# Altium PCB PCB.PcbDoc
Units mm, origin at the board's own origin, x right, y up, seen from the top; angles counter-clockwise.
Board outline 100.25 x 95.41 mm, 2 copper layers (Top Layer, Bottom Layer); 83 components, 112 nets, 272 pads, 109 vias.
Unrouted connection lines stored in the file: 85.
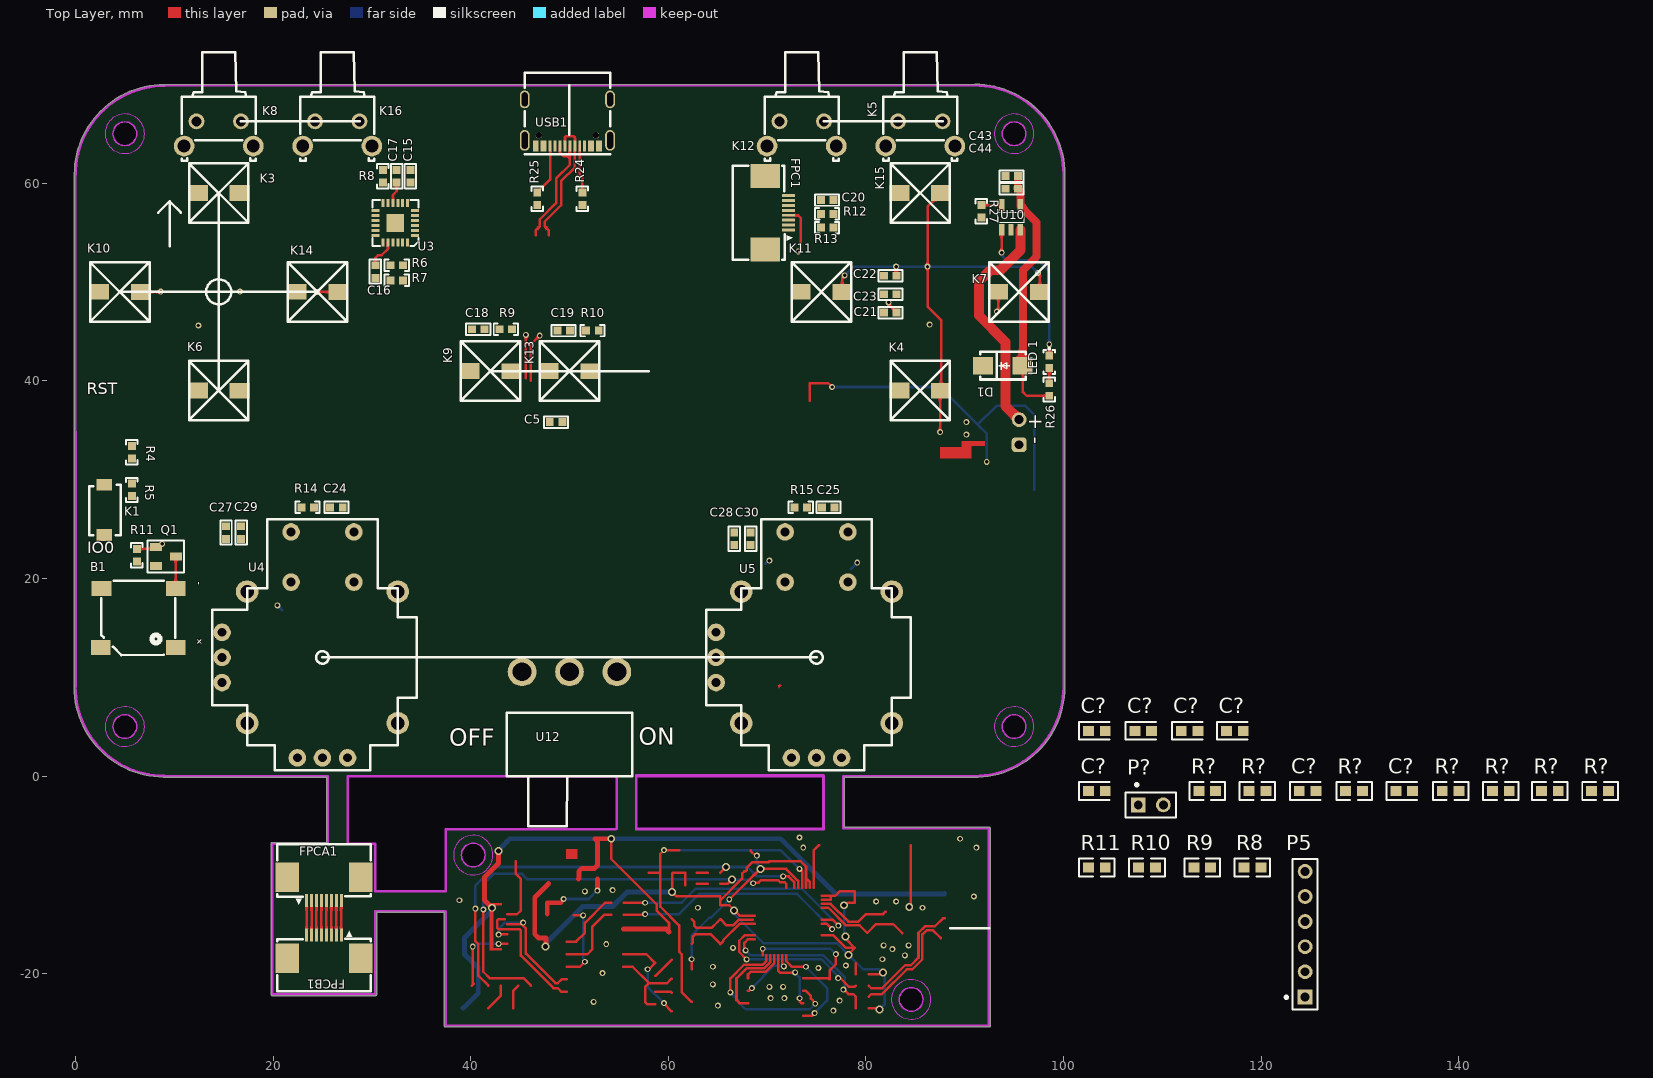
[diagram p0: Top Layer view]
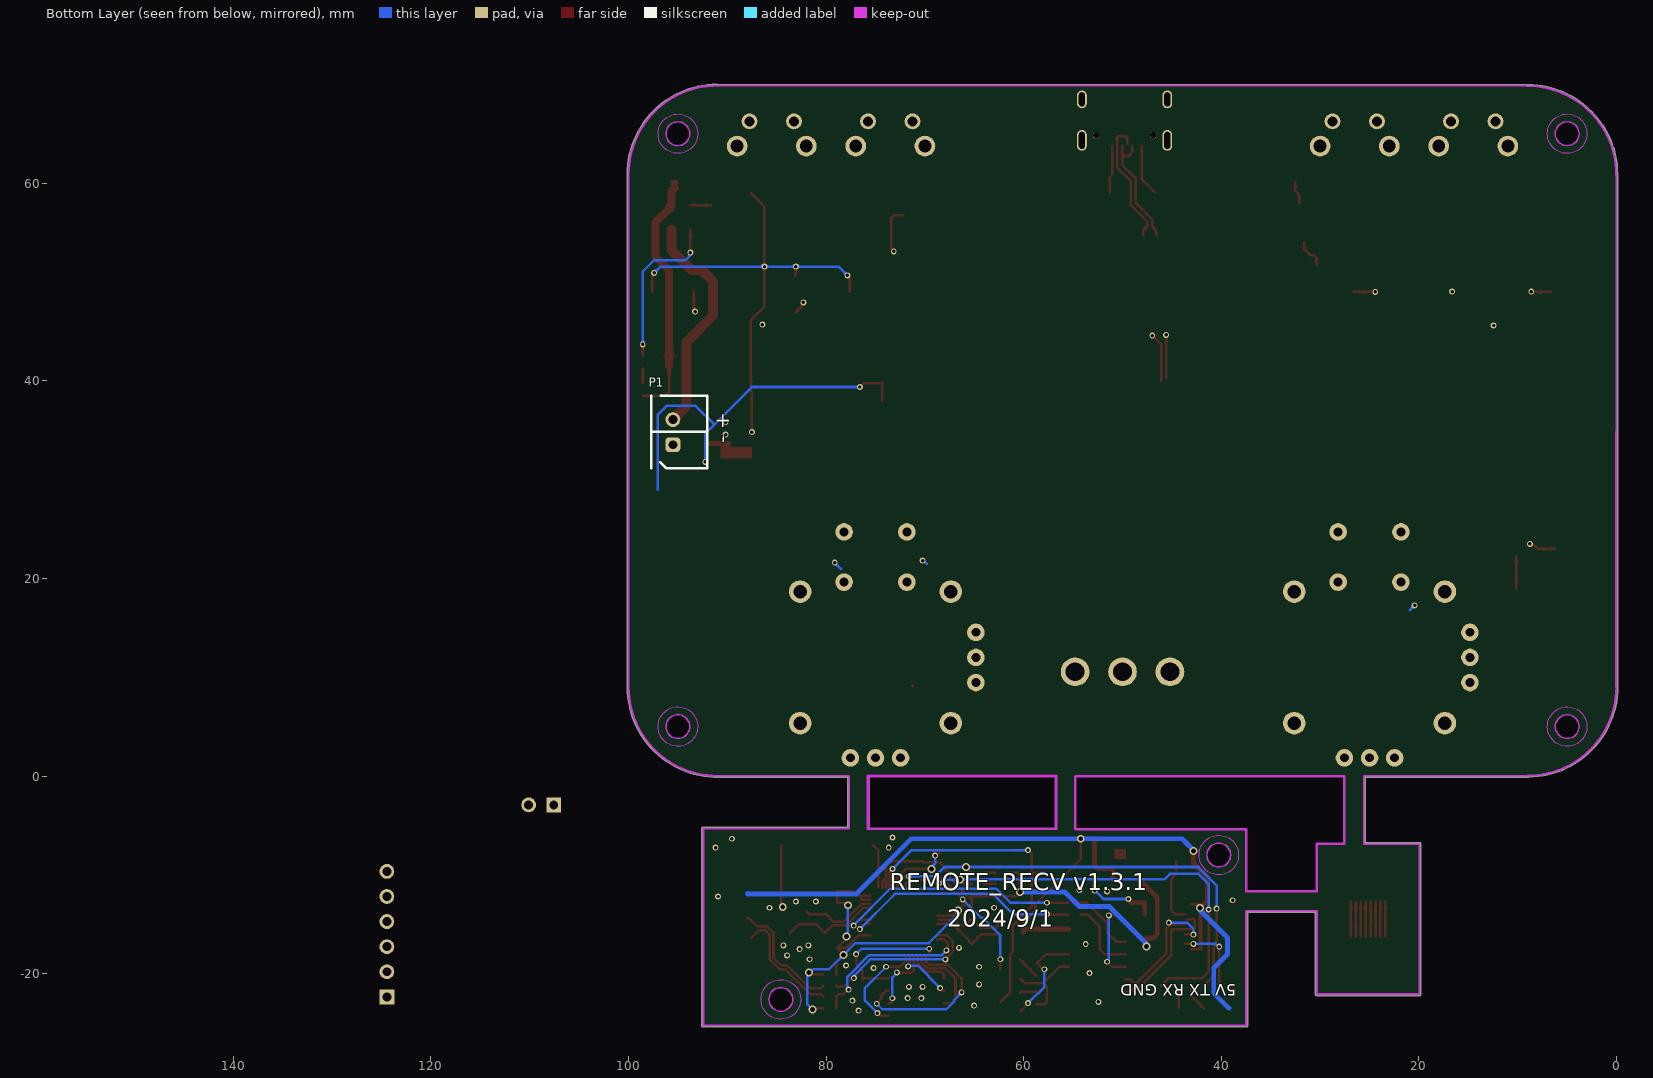
[diagram p1: Bottom Layer view, seen from below]

## Layer stack, top to bottom
Top Solder: solder mask 0.0102, Solder Resist, Dk 3.5
Top Layer: signal copper 0.0356
Dielectric 1: dielectric 0.32, FR-4, Dk 4.8
Bottom Layer: signal copper 0.0356
Bottom Solder: solder mask 0.0102, Solder Resist, Dk 3.5

## Board outline
-0.127,9.017 ccw(c9,9.017) 8.936,-0.11 ccw(c9,0) 9,-0.127 25.432,-0.127 25.432,-6.731 19.939,-6.731 ccw(c19.939,-6.858) 19.812,-6.858 19.812,-22.098 ccw(c19.939,-22.098) 19.939,-22.225 30.353,-22.225 ccw(c30.353,-22.098) 30.48,-22.098 30.48,-13.811 37.338,-13.811 37.338,-25.273 ccw(c37.465,-25.273) 37.465,-25.4 92.456,-25.4 ccw(c92.456,-25.273) 92.583,-25.273 92.583,-5.302 ccw(c92.456,-5.302) 92.456,-5.175 77.819,-5.175 77.819,-0.127 91.313,-0.127 ccw(c91.313,0) 91.354,-0.121 ccw(c91,9) 100.127,9 100.127,60.895 ccw(c91.011,60.895) 91.011,70.011 ccw(c91.011,69.884) 91.011,70.011 9.017,69.977 ccw(c9.017,69.85) 9.017,69.977 ccw(c9.017,60.85) 9.008,69.977 9.017,69.977 9.008,69.977 9,69.977 ccw(c9,69.85) 8.998,69.977 cw(c9.017,60.85) 9.008,69.977 8.998,69.977 ccw(c9.017,60.85) -0.11,60.897 ccw(c0,60.833) -0.127,60.833 -0.107,9.086 ccw(c0,9.017)
cut-out: 83.382,-22.606 ccw(c84.582,-22.606) 84.582,-23.806 ccw(c84.582,-22.606) 85.782,-22.606 ccw(c84.582,-22.606) 84.582,-21.406 ccw(c84.582,-22.606)
cut-out: 39.059,-8.001 ccw(c40.259,-8.001) 40.259,-9.201 ccw(c40.259,-8.001) 41.459,-8.001 ccw(c40.259,-8.001) 40.259,-6.801 ccw(c40.259,-8.001)
cut-out: 56.642,-5.334 ccw(c56.769,-5.334) 56.769,-5.461 75.56,-5.461 ccw(c75.56,-5.334) 75.626,-5.443 ccw(c75.692,-5.334) 75.819,-5.334 75.819,0 ccw(c75.692,0) 75.692,0.127 56.769,0.127 ccw(c56.769,0) 56.642,0
cut-out: 93.8,5 ccw(c95,5) 95,3.8 ccw(c95,5) 96.2,5 ccw(c95,5) 95,6.2 ccw(c95,5)
cut-out: 3.8,5 ccw(c5,5) 5,3.8 ccw(c5,5) 6.2,5 ccw(c5,5) 5,6.2 ccw(c5,5)
cut-out: 5,63.8 cw(c5,65) 3.8,65 cw(c5,65) 5,66.2 cw(c5,65) 6.2,65 cw(c5,65)
cut-out: 93.8,65 ccw(c95,65) 95,63.8 ccw(c95,65) 96.2,65 ccw(c95,65) 95,66.2 ccw(c95,65)
cut-out: 27.559,-6.858 27.559,0 54.674,0 54.769,-0.095 54.769,-5.334 54.703,-5.4 37.465,-5.4 37.465,-11.684 30.353,-11.684 30.353,-6.858

## Design rules (kind name [scope] priority, off if disabled: settings)
Clearance [All] p1: gap=0.1 ignorepadtopadclearanceinfootprint=FALSE except(0: Arc-Hole Track-Hole SMDPad-Hole THPad-Hole Via-Hole Fill-Hole Poly-Hole Region-Hole Text-Hole; 0.102: Arc-Arc Arc-Track Arc-SMDPad Arc-THPad Track-Track Track-SMDPad Track-THPad SMDPad-SMDPad SMDPad-THPad THPad-THPad; 0.127: Arc-Via Track-Via SMDPad-Via SMDPad-Text THPad-Via Via-Via; 0.254: Arc-Text Track-Text THPad-Text Via-Text Fill-Text Poly-Text Region-Text Text-Text)
DiffPairsRouting [All] p1: maxlimit=0.254 minlimit=0.15 mostfreqgap=0.254 toplayer_minwidth=0.2 toplayer_maxwidth=0.381 toplayer_prefwidth=0.25 bottomlayer_minwidth=0.2 bottomlayer_maxwidth=0.381 bottomlayer_prefwidth=0.25 maxuncoupledlength=12.7
HoleSize [All] p1: absolutevalues=TRUE maxlimit=30 minlimit=0.025 maxpercent=80.000 minpercent=20.000
HoleToHoleClearance [All] p1: gap=0.152 allowstackedmicrovias=TRUE
MinimumSolderMaskSliver [All] p1: minsoldermaskwidth=0
PlaneClearance [All] p1: clearance=0.254
PlaneConnect [All] p1: planeconnectstyle=Direct reliefexpansion=0.508 reliefentries=4 reliefconductorwidth=0.254 reliefairgap=0.254
PolygonConnect [All] p1: connectstyle=Direct reliefconductorwidth=0.254 reliefentries=4 polygonreliefangle="90 Angle" airgapwidth=0.254
RoutingVias [All] p1: holewidth=0.711 width=1.27 viastyle="Through Hole" minholewidth=0.3 minwidth=0.5 maxholewidth=30 maxwidth=30
SilkToSilkClearance [All] p1: silktosilkclearance=0
SilkToSolderMaskClearance [IsPad] p1: minsilkscreentomaskgap=0 clearancetoexposedcopper=TRUE
SolderMaskExpansion [All] p1: expansion=0.102 istentingtop=FALSE
Width [All] p1: maxlimit=3 minlimit=0.1 preferedwidth=0.254
22 further rules are at their usual default settings.

## Classes and differential pairs
component class connect_board: FPCA1 FPCB1
component class Sheet0-mcu: C5 K1 "LED 1" P5 R4 R5 R8 R9 R10 R11
component class Sheet1-control: B1 C15 C16 C17 C18 C19 C20 C21 C22 C23 C24 C25 C27 C28 C29 C30 C? FPC1 K3 K4 K5 K6 K7 K8 K9 K10 K11 K12 K13 K14 K15 K16 P? Q1 R6 R7 R8 R9 R10 R11 R12 R13 R14 R15 R? U3 U4 U5
component class Sheet2-USB: C43 C44 C? D1 "LED 1" P1 R24 R25 R26 R27 U10 U12 USB1
differential pair USB: +USB_P -USB_N

## Components (designator, comment, footprint, x,y, rotation, side; value= is the part's Value field where it differs from the comment)
B1 "BUZZER1" BUZ-SMD_GSC7525RA 6.35,16.002 r180 top
C5 "12.5pF" CC1608-0603#1 48.641,35.814 r0 top
C15 "100NF 50V" CC1608-0603#1 33.909,60.706 r270 top
C16 "2.2UF" CC1608-0603#1 30.353,51.054 r270 top
C17 "100NF" CC1608-0603#1 32.512,60.706 r270 top
C18 "100PF" CC1608-0603#1 40.767,45.212 r180 top
C19 "100PF" CC1608-0603#1 49.403,45.085 r180 top
C20 "100NF" CC1608-0603#1 76.073,58.293 r0 top
C21 "100pF" CC1608-0603#1 82.478,46.89 r0 top locked
C22 "100pF" CC1608-0603#1 82.478,50.628 r0 top
C23 "100pF" CC1608-0603#1 82.478,48.759 r0 top
C24 "100nF" CC1608-0603#1 26.416,27.178 r180 top
C25 "100nF" CC1608-0603#1 76.2,27.178 r180 top
C27 "100nF" CC1608-0603#1 15.24,24.638 r90 top
C28 "100nF" CC1608-0603#1 66.675,24.003 r90 top
C29 "100pF" CC1608-0603#1 16.764,24.638 r90 top
C30 "100pF" CC1608-0603#1 68.326,24.003 r90 top
C43 "1uF" CC1608-0603#1 94.742,60.706 r0 top
C44 "100NF" CC1608-0603#1 94.742,59.436 r0 top
C? "100PF" CC1608-0603#2 103.368,-1.524 r0 top
C? "100NF" CC1608-0603#2 134.483,-1.524 r0 top
C? "100NF" CC1608-0603#2 124.704,-1.524 r0 top
C? "100NF" CC1608-0603#2 112.766,4.572 r0 top
C? "10UF" CC1608-0603#2 108.067,4.572 r0 top
C? "10UF" CC1608-0603#2 117.338,4.572 r0 top
C? "100NF" CC1608-0603#2 103.368,4.572 r0 top
D1 "SS34" "DO-214 AA" 93.853,41.529 r0 top
FPC1 "FFC 05 8P" FFC-SMD_8P-P0.50 71,57 r270 top locked
FPCA1 "FFC 05 8P" FFC-SMD_8P-P0.50 25.156,-11.43 r180 top
FPCB1 "FFC 05 8P" FFC-SMD_8P-P0.50 25.156,-17.272 r0 top
K1 "KEY 3*4" "KEY 3*4" 2.921,24.384 r90 top
K3 "KEY 6*6*5" "KEY 6*6*5" 14.5,59 r0 top locked
K4 "KEY 6*6*5" "KEY 6*6*5" 85.5,39 r0 top locked
K5 "SW-TH_4P_H" SW-TH_KH-6X6X7H-ZJ 85.5,65 r0 top locked
K6 "KEY 6*6*5" "KEY 6*6*5" 14.5,39 r0 top locked
K7 "KEY 6*6*5" "KEY 6*6*5" 95.5,49 r0 top locked
K8 "SW-TH_4P_H" SW-TH_KH-6X6X7H-ZJ 14.5,65 r0 top locked
K9 "KEY 6*6*5" "KEY 6*6*5" 42,40.983 r0 top locked
K10 "KEY 6*6*5" "KEY 6*6*5" 4.5,49 r0 top locked
K11 "KEY 6*6*5" "KEY 6*6*5" 75.5,49 r0 top locked
K12 "SW-TH_4P_H" SW-TH_KH-6X6X7H-ZJ 73.5,65 r0 top locked
K13 "KEY 6*6*5" "KEY 6*6*5" 50,40.983 r0 top locked
K14 "KEY 6*6*5" "KEY 6*6*5" 24.5,49 r0 top locked
K15 "KEY 6*6*5" "KEY 6*6*5" 85.5,59 r0 top locked
K16 "SW-TH_4P_H" SW-TH_KH-6X6X7H-ZJ 26.5,65 r0 top locked
"LED 1" "LED 0603" "LED 0603" 98.552,41.91 r90 top
P1 "Header 2" HX2.54-2 95.504,33.528 r90 bottom locked
P5 "Header 6" HDR1X6 124.45,-22.352 r90 top
P? "Header 2" HDR1X2 107.559,-2.921 r0 top
Q1 "SI2302" SOT-23 8.14,23.175 r270 top
R4 "22R" CR1608-0603#1 5.715,32.766 r270 top
R5 "22R" CR1608-0603#1 5.715,28.956 r90 top
R6 "2K" CR1608-0603#1 32.512,51.689 r0 top
R7 "2K" CR1608-0603#1 32.512,50.165 r0 top
R8 "470R" CR1608-0603#2 119.116,-9.271 r0 top
R8 "4.7K" CR1608-0603#1 31.115,60.706 r270 top
R9 "470R" CR1608-0603#2 114.036,-9.271 r0 top
R9 "10K" CR1608-0603#1 43.561,45.212 r180 top
R10 "1K" CR1608-0603#2 108.448,-9.271 r0 top
R10 "10K" CR1608-0603#1 52.324,45.085 r180 top
R11 "1K" CR1608-0603#2 103.368,-9.271 r0 top
R11 "33KR" CR1608-0603#1 6.223,22.352 r270 top
R12 "10K" CR1608-0603#1 76.073,56.896 r0 top
R13 "10K" CR1608-0603#1 76.073,55.499 r0 top
R14 "10K" CR1608-0603#1 23.495,27.178 r180 top
R15 "10K" CR1608-0603#1 73.406,27.178 r180 top
R24 "5.1K" CR1608-0603#1 51.308,58.42 r90 top
R25 "5.1K" CR1608-0603#1 46.736,58.42 r90 top
R26 "1K" CR1608-0603#1 98.552,39.116 r90 top
R27 "2K" CR1608-0603#1 91.694,57.15 r270 top
R? "10K" CR1608-0603#2 129.403,-1.524 r0 top
R? "100R" CR1608-0603#2 114.544,-1.524 r0 top
R? "10K" CR1608-0603#2 119.624,-1.524 r0 top
R? "10KR" CR1608-0603#2 139.182,-1.524 r0 top
R? "100KR" CR1608-0603#2 154.295,-1.524 r0 top
R? "10K" CR1608-0603#2 149.215,-1.524 r0 top
R? "10K" CR1608-0603#2 144.262,-1.524 r0 top
U3 "MPU6050" "QFN24 - duplicate" 32.373,55.975 r180 top
U4 "rocker" PCBCOMPONENT_1 25,12 r0 top locked
U5 "rocker" PCBCOMPONENT_1 75,12 r0 top locked
U10 "TP4054" SOT23-5 95.636,55.285 r180 top
U12 "HX SS12D10G4" SW-TH_3P-SS12D06 50,10.541 r0 top locked
USB1 "Tpye-c 16P" "TYPE-C 16P" 46.898,64.829 r180 top locked

## Footprints (in the part's own frame and the unit in brackets; to place one, negate y for a bottom-side part, rotate by r counter-clockwise, add the part's x,y. Pads: shape width x height; smd on the part's side, far side on the other; paste and mask are expansions set on the pad)
BUZ-SMD_GSC7525RA [mm]
  rect 2x1.5 smd paste+0 mask+0.051: 1(-3.795,2.98) 2(-3.795,-2.98) 3(3.705,-2.98) 3(3.795,2.98)
  silkscreen extent -3.75,-3.75 3.76,3.76, body extent -3.81,-3.81 3.69,3.69, height 2.5
CC1608-0603#1 [mm]
  rect 0.8x0.8 smd: 1(-0.635,0) 2(0.635,0)
  silkscreen extent -1.23,-0.58 1.23,0.58, body extent -0.8,-0.4 0.8,0.4, height 0.3
CC1608-0603#2 [mm]
  rect 1.1x1 smd: 1(-0.85,0) 2(0.85,0)
  silkscreen extent -1.8,-0.9 1.3,0.9, body extent -0.8,-0.4 0.8,0.4, height 0.3
CR1608-0603#1 [mm]
  rect 0.8x0.8 smd: 1(-0.635,0) 2(0.635,0)
  silkscreen extent -1.23,-0.58 1.23,0.58, body extent -0.8,-0.4 0.8,0.4, height 0.45
CR1608-0603#2 [mm]
  rect 1.1x1 smd: 1(-0.85,0) 2(0.85,0)
  silkscreen extent -1.8,-0.9 1.8,0.9, body extent -0.8,-0.4 0.8,0.4, height 0.45
"DO-214 AA" [mm] "SMB"
  rect 2x1.8 smd: 1(-2,0) 2(2,0)
  silkscreen extent -2.3,-1.4 2.3,1.4, body extent -2.83,-1.8 2.57,1.8, height 2.4
FFC-SMD_8P-P0.50 [mm]
  rect 0.3x1.3 smd paste+0 mask+0.051: 1(1.75,1.175) 2(1.25,1.175) 3(0.75,1.175) 4(0.25,1.175) 5(-0.25,1.175) 6(-0.75,1.175) 7(-1.25,1.175) 8(-1.75,1.175)
  rect 2.4x3 smd paste+0 mask+0.051: 9(3.725,-1.175) 10(-3.725,-1.175)
  silkscreen extent -4.75,-4.5 4.75,1.6, body extent -3.18,-2.71 3.18,0.89, height 0.85
HDR1X2 [mm] "Connector; Header; 2 Position"
  rect 1.5x1.5 hole 0.9: 1(0,0)
  round 1.5 hole 0.9: 2(2.54,0)
  silkscreen extent -1.27,-1.27 3.81,2.17, body extent -1.27,-1.27 3.81,1.27, height 8.54
HDR1X6 [mm] "Connector; Header; 6 Position"
  rect 1.5x1.5 hole 0.9: 1(0,0)
  round 1.5 hole 0.9: 2(2.54,0) 3(5.08,0) 4(7.62,0) 5(10.16,0) 6(12.7,0)
  silkscreen extent -1.27,-1.27 13.97,2.04, body extent -1.27,-1.27 13.97,1.27, height 8.54
HX2.54-2 [mm] "两针白色插座（已加焊）"
  rrect50% 1.5x1.5 hole 0.9: 1(0,0)
  round 1.5 hole 0.9: 2(2.54,0)
  silkscreen extent -2.36,-3.5 4.94,2.2, body extent -2.48,-3.55 5.02,2.45, height 7
"KEY 3*4" [mm]
  rect 1.2x1.6 smd: 1(0,0) 2(5.1,0)
  silkscreen extent 0,-1.65 5.08,1.52, body extent 0.25,-1.71 4.7,1.46, height 2.01
"KEY 6*6*5" [mm] "无声微动开关"
  rect 2x1.6 smd: 1(-2.1,0) 2(2.1,-0.013)
  silkscreen extent -3,-3.01 3,3.01, body extent -3.32,-3.05 3.33,3.05, height 5
"LED 0603" [mm]
  rect 0.8x0.8 smd: 1(-0.635,0) 2(0.635,0)
  silkscreen extent -1.21,-0.57 1.4,0.57, body extent -0.8,-0.4 0.8,0.4, height 0.6
PCBCOMPONENT_1 [mil]
  round 70 hole 35.4 paste+0 mask+4: 1(-125,500) 2(125,500) 3(-125,300) 4(125,300)
  round 70 hole 35 paste+0 mask+4: 5(-400,100) 6(-400,0) 7(-400,-100) 8(-100,-400) 9(0,-400) 10(100,-400)
  round 90 hole 55 paste+0 mask+4: MOUNT1(-300,262) MOUNT2(-300,-262) MOUNT3(300,-262) MOUNT4(300,262)
  silkscreen extent -440,-450 375,550, body extent -447,-446 290,535, height 772
"QFN24 - duplicate" [mm]
  rect 0.8x0.3 smd: 1(-2,1.25) 2(-2,0.75) 3(-2,0.25) 4(-2,-0.25) 5(-2,-0.75) 6(-2,-1.25) 13(2,-1.25) 14(2,-0.75) 15(2,-0.25) 16(2,0.25) 17(2,0.75) 18(2,1.25)
  rect 1.8x1.8 smd: 1(0.005,0)
  rect 0.3x0.8 smd: 7(-1.25,-2) 8(-0.75,-2) 9(-0.25,-2) 10(0.25,-2) 11(0.75,-2) 12(1.25,-2) 19(1.25,2) 20(0.75,2) 21(0.25,2) 22(-0.25,2) 23(-0.75,2) 24(-1.25,2)
  silkscreen extent -2.32,-2.32 2.32,2.32, body extent -2,-2 2.01,2, height 0.9
SOT23-5 [mm] "适用于MIC5205"
  rect 0.55x1.2 smd: 1(1.905,0) 2(0.955,0) 3(0.005,0) 4(0.005,-2.5) 5(1.905,-2.5)
  silkscreen extent -0.38,-1.78 2.29,-0.76, body extent -0.6,-2.82 2.5,0.38, height 1.45
SOT-23 [mm]
  rect 0.8x1.2 smd: 1(0,0) 2(1.905,0) 3(0.95,2.02)
  silkscreen extent -0.66,-0.84 2.57,2.84, body extent -0.61,-0.23 2.39,2.27, height 1.05
SW-TH_3P-SS12D06 [mm]
  round 2.9 hole 1.9 paste+0 mask+0.051: 1(-4.8,0) 2(0,0) 3(4.8,0)
  silkscreen extent -6.35,-15.62 6.35,-4.15, body extent -6.35,-15.68 6.35,-4.19, height 6.7
SW-TH_KH-6X6X7H-ZJ [mm]
  round 1.6 hole 1 paste+0 mask+0.05: 1(2.25,1.25) 2(-2.25,1.25)
  round 2.1 hole 1.3 paste+0 mask+0.05: 3(3.5,-1.25) 4(-3.5,-1.25)
  silkscreen extent -3.75,-2.75 3.75,8.25, body extent -3.75,-2.48 3.75,5.67, height 7.5
"TYPE-C 16P" [mm]
  oval 1x2.099 hole 0.6 slot 1.7 at 90 deg: 1(-7.21,0.5) 2(1.43,0.5)
  oval 1x1.799 hole 0.6 slot 1.4 at 90 deg: 3(-7.21,-3.65) 4(1.43,-3.65)
  rect 0.6x1.15 smd: A1B12(-6.09,1.075) A4B9(-5.29,1.075) B1A12(0.31,1.075) B4A9(-0.49,1.075)
  rect 0.3x1.15 smd: A5(-4.14,1.075) A6(-3.14,1.075) A7(-2.64,1.075) A8(-1.64,1.075) B5(-1.14,1.075) B6(-2.14,1.075) B7(-3.64,1.075) B8(-4.64,1.075)
  round 0.65 hole 0.65 unplated: ""(-5.78,0) ""(0,0)
  silkscreen extent -7.21,-6.37 1.43,1.89, body extent -7.31,-6 1.63,0.9, height 3.18

## Part data
B1: "2700Hz", Manufacturer=INGHAi(赢海), Manufacturer Part=GSC7525RA-16R2700, Contributor=LCSC, nameAlias=Value, spicePre=B, spiceSymbolName=GSC7525RA-16R2700, Supplier=LCSC, Supplier Part=C255313
C5 C15 C16 C17 C18 C19 C20 C21 C22 C23 C24 C25 C27 C28 C29 C30 C43 C44 C? C? C? C? C? C? C?: library part "Cap Chip 0603", "0603封装的电容", Published=8-Jun-2000, Publisher="Altium Limited", Revision="July-2002: Re-released for DXP Platform."
D1: "肖特基二极管"
FPC1 FPCA1 FPCB1: JLCPCB Part Class="Extended Part", Manufacturer=TXGA(特思嘉), Manufacturer Part=FFC05001-08SBB124W5M-H, Contributor=LCSC, spicePre=F, spiceSymbolName=FFC05001-08SBB124W5M-H, Supplier=LCSC, Supplier Part=C456420
K1: "轻触开关按键"
K3 K4 K6 K7 K9 K10 K11 K13 K14 K15: "无声轻触开关"
K5 K8 K12 K16: "卧式轻触开关"
P1 P?: "Header, 2-Pin", LatestRevisionDate=17-Jul-2002, LatestRevisionNote="Re-released for DXP Platform.", Publisher="Altium Limited"
P5: "Header, 6-Pin", LatestRevisionDate=17-Jul-2002, LatestRevisionNote="Re-released for DXP Platform.", Publisher="Altium Limited"
Q1: "N沟道  / 漏源电压(Vdss) 20V  / 连续漏极电流(Id) 2.8A  / 功率(Pd) 900mW  / 导通电阻(RDS(on)@Vgs,Id) 55mΩ@4.5V,2.8A  / 阈值电压(Vgs(th)@Id) 1.2V@250uA  / 输入电容(Ciss@Vds) 260pF@10V", JLCPCB Part Class="Extended Part", Manufacturer=TWGMC(台湾迪嘉), Manufacturer Part=SI2306, Contributor=LCSC, spicePre=Q, spiceSymbolName=SI2306_C727154, Supplier=LCSC, Supplier Part=C727154
R4 R5 R6 R7 R8 R9 R10 R10 R11 R12 R13 R14 R15 R24 R25 R26 R27 R? R? R? R? R?: library part "Resistor Chip 0603", "0603封装电阻", Published=8-Jun-2000, Publisher="Altium Limited", Revision="July-2002: Re-released for DXP Platform."
R8 R9 R11 R? R?: library part "Chip resistor", "贴片电阻"
U3: "陀螺仪"
U4 U5: Manufacturer Part=摇杆, Contributor=Alex_Ai, spicePre=U, spiceSymbolName="摇杆_直插_圆半径13_10电气脚_4固定脚 COPY"
U10: "迷你充电IC SOT-23-5"
U12: library part SW-TH_3P-SS12D06, BOM_JLCPCB Part Class="Extended Part", BOM_Manufacturer=hanxia(韩下), BOM_Manufacturer Part="HX SS12D10G4", BOM_Supplier=LCSC, BOM_Supplier Part=C5149841, Contributor=lcsc, link=https://atta.szlcsc.com/upload/public/pdf/source/20220907/2020D7183ED16DD6E2B9F5A13FB144CF.pdf, spicePre=U, spiceSymbolName="HX SS12D10G4"
USB1: "16P 封装的TYPE -c接口 4固定插脚 双向"

## Via types
v1: diameter 0.6, hole 0.35, Top Layer to Bottom Layer, tented both sides, 94 vias
v2: diameter 0.8, hole 0.5, Top Layer to Bottom Layer, tented both sides, 15 vias

## Nets (pads, with @x,y where several pads share a name; then routed paths per layer and width w, separated by ;. In a path a pad name is that pad's centre, name@x,y a point inside that pad or via, vN(x,y) a via of type N, cw(c..) or ccw(c..) an arc to the next point about the centre after c; other vN are vias at no path point)
3.3V: B1.1 C15.2 C20.1 FPC1.7 R6.1 R7.1 R8.1@31.115,61.341 R9.1@44.196,45.212 R10.1@52.959,45.085 R12.2 R13.2 R14.2 R15.2 R?.2@155.145,-1.524 U3.8 U3.13 U4.5 U4.8 U5.5 U5.8
5V: C?.2@104.218,4.572 C?.2@108.917,4.572 D1.1
ADC_BAT: C?.2@135.333,-1.524 R?.1@148.365,-1.524 R?.2@130.253,-1.524
ADC_LX: C27.2 U4.6
ADC_LY: C29.2 U4.9
ADC_RX: C28.2 U5.6
ADC_RY: C30.2 U5.9
BAT: P?.1 R?.1@113.694,-1.524 R?.2@150.065,-1.524 U12.3
BEEP: Q1.1 R11.1@6.223,22.987 | length 2.8
  Top Layer w0.254: R11.1@6.223,22.987 7.952,22.987 8.394,23.429 8.603,23.429 8.669,23.495 v1(8.763,23.495)
BOOT0: 
EN: P?.2
GND: "LED 1.2" C5.1 C15.1 C16.2 C17.1 C18.2 C19.2 C20.2 C21.1 C22.1 C23.1 C24.1 C25.1 C27.1 C28.1 C29.1 C30.1 C43.1 C44.1 C?.1@102.518,4.572 C?.1@107.217,4.572 C?.1@111.916,4.572 C?.1@116.488,4.572 C?.1@123.854,-1.524 C?.1@133.633,-1.524 FPC1.2 K1.2 K9.2 K13.2 P1.1 P5.4 Q1.2 R11.2@6.223,21.717 R24.1 R25.1 R27.2 R?.1@118.774,-1.524 R?.1@128.553,-1.524 R?.1@138.332,-1.524 U3.1 U3.6 U3.7 U3.9 U3.11 U3.18 U4.1 U4.7 U4.10 U5.1 U5.7 U5.10 U10.2 USB1.1 USB1.2 USB1.3 USB1.4 USB1.A1B12 USB1.B1A12
IIC2_SCL: R6.2 U3.23
IIC2_SDA: R7.2 U3.24
KET_y: K14.1 K15.1 K16.1
KEY_1: C24.2 R14.1 U4.3
kEY_2: C25.2 R15.1 U5.3
KEY_a: K3.1 K4.1 K5.1 | length 1.3
  Bottom Layer w0.254: v1(20.447,17.272) 20.955,16.764 ; 69.802,21.463 70.137,21.798 v1(70.231,21.798)
KEY_b: K6.1 K7.1 K8.1 | length 3
  Top Layer w0.254: v1(93.251,46.99) 93.4,47.139 K7.1
  Bottom Layer w0.254: 78.486,20.955 v1(79.121,21.59)
  other v1: 12.446,45.593 86.455,45.688
KEY_CHA: R?.1@153.445,-1.524
KEY_CHA_IN: C?.2@104.218,-1.524 R?.2@140.032,-1.524
KEY_DOWN_1: C21.2 K3.2 K6.2 K10.2 K14.2 | length 5.6
  Top Layer w0.254: K10.2 v1@8.601,48.987 ; v1(24.419,48.987) K14.2 ; v1(82.296,47.925) 82.362,47.859 82.362,47.641 C21.2
  other v1: 8.636,49.022 16.637,49.022
KEY_DOWN_2: C22.2 K4.2 K7.2 K11.2 K15.2 | length 50.3
  Top Layer w0.254: K11.2 77.6,50.422 v1(77.851,50.673) ; v1(83.058,51.562) 83.058,50.683 C22.2 ; v1(87.503,34.798) 87.503,38.89 K4.2 87.6,46.131 86.233,47.498 86.233,57.62 K15.2 ; v1(97.409,50.927) 97.6,50.736 K7.2
  Bottom Layer w0.254: v1(77.851,50.673) 78.74,51.562 v1(83.058,51.562) v1(86.233,51.562) 96.774,51.562 v1(97.409,50.927)
KEY_DOWN_3: C23.2 K5.2 K8.2 K12.2 K16.2
KEY_left: K10.1 K11.1 K12.1
KEY_select: C18.1 K9.1 R9.2@42.926,45.212
KEY_start: C19.1 K13.1 R10.2@51.689,45.085
KEY_USB: C?.2@125.554,-1.524 R?.1@143.412,-1.524 R?.2@120.474,-1.524
LCD_LEDA: FPC1.1
LCD_REST: FPC1.3
LCD_RS: FPC1.4 | length 4.8
  Top Layer w0.254: FPC1.4 72.183,56.742 73.152,56.742 73.406,56.488 73.406,53.408 73.152,53.154 v1(73.152,53.086)
MPU_INT: R8.2@31.115,60.071 U3.12
NetB1_2: B1.2 Q1.3 | length 3.2
  Top Layer w0.254: B1.2 10.145,22.21 Q1.3
NetC16_1: C16.1 U3.20 | length 3
  Top Layer w0.254: C16.1 30.353,52.451 30.607,52.705 30.988,52.705 31.623,53.34 U3.20
NetC17_2: C17.2 U3.10 | length 2.3
  Top Layer w0.254: U3.10 32.123,58.793 32.512,59.182 C17.2
NetC?_1: C?.1@102.518,-1.524 R?.2@115.394,-1.524
NetFPCA1_1: FPCA1.1 FPCB1.8 | length 3.5
  Top Layer w0.254: FPCB1.8@23.396,-16.224 FPCA1.1@23.396,-12.732
NetFPCA1_2: FPCA1.2 FPCB1.7 | length 3.5
  Top Layer w0.254: FPCB1.7@23.896,-16.224 FPCA1.2@23.896,-12.732
NetFPCA1_3: FPCA1.3 FPCB1.6 | length 3.5
  Top Layer w0.254: FPCB1.6@24.396,-16.224 FPCA1.3@24.396,-12.732
NetFPCA1_4: FPCA1.4 FPCB1.5 | length 3.5
  Top Layer w0.254: FPCB1.5@24.896,-16.224 FPCA1.4@24.896,-12.732
NetFPCA1_5: FPCA1.5 FPCB1.4 | length 3.5
  Top Layer w0.254: FPCB1.4@25.396,-16.224 FPCA1.5@25.396,-12.732
NetFPCA1_6: FPCA1.6 FPCB1.3 | length 3.5
  Top Layer w0.254: FPCB1.3@25.896,-16.224 FPCA1.6@25.896,-12.732
NetFPCA1_7: FPCA1.7 FPCB1.2 | length 3.5
  Top Layer w0.254: FPCB1.2@26.396,-16.224 FPCA1.7@26.396,-12.732
NetFPCA1_8: FPCA1.8 FPCB1.1 | length 3.5
  Top Layer w0.254: FPCB1.1@26.896,-16.224 FPCA1.8@26.896,-12.732
"NetLED 0_1": R10.2@109.298,-9.271
"NetLED 1_1": "LED 1.1" R26.2 | length 1.5
  Top Layer w0.254: R26.2 98.552,41.275
"NetLED 1_2": U10.1 | length 16.6
  Top Layer w0.254: v1(93.731,52.964) U10.1 ; 98.552,42.545 v1(98.552,43.688)
  Bottom Layer w0.254: v1(93.731,52.964) 93.731,52.7 94.234,52.197 97.409,52.197 98.552,51.054 v1(98.552,43.688)
NetP1_2: P1.2 U10.3 U12.1 U12.2 | length 23.2
  Top Layer w1: P1.2 94.107,37.465 94.107,43.942 91.44,46.609 91.44,50.038 92.583,51.181 93.599,51.181 95.631,53.213 U10.3
NetP5_1: P5.1 R9.2@114.886,-9.271
NetP5_2: P5.2 R8.2@119.966,-9.271
NetR24_2: R24.2 USB1.A5 | length 6
  Top Layer w0.254: 51.092,62.538 51.061,62.569 51.061,63.731 USB1.A5 51.038,60.849 51.308,60.579 R24.2
NetR25_2: R25.2 USB1.B5 | length 5.2
  Top Layer w0.254: R25.2 48.038,60.357 48.038,61.436 USB1.B5
NetR27_1: R27.1 U10.5 | length 2
  Top Layer w0.254: R27.1 U10.5
OSC32_IN: 
OSC32_OUT: C5.2
OSC_IN: 
OSC_OUT: 
PA0: 
PA1: 
PA2: 
PA3: 
PA4: 
PA5: 
PA6: 
PA7: 
PA8: 
PA9: R9.1@113.186,-9.271
PA10: R8.1@118.266,-9.271
PA11: R5.1
PA12: R4.1
PA13: P5.5
PA14: P5.6
PA15: 
PB0: 
PB1: 
PB2: 
PB3: 
PB4: 
PB5: 
PB6: 
PB7: 
PB9: 
PB10: 
PB11: 
PB12: 
PB13: 
PB14: 
PB15: 
PC0: 
PC1: 
PC2: 
PC3: 
PC4: 
PC5: 
PC6: 
PC7: 
PC8: 
PC9: 
PC10: 
PC11: 
PC12: 
PC13: R10.1@107.598,-9.271
PD2: 
POWER_EN: 
REST: K1.1
SPI2_CLK: FPC1.6 R12.1 | length 4.4
  Top Layer w0.254: 45.593,40.254 v1(45.593,44.636)
SPI2_CS0: FPC1.8
SPI2_MOSI: FPC1.5 R13.1 | length 4.9
  Top Layer w0.254: 46.101,40.016 46.101,43.693 46.985,44.577 v1(46.99,44.577)
"USB 5V": C43.2 C44.2 D1.2 R26.1 R?.2@145.112,-1.524 U10.4 USB1.A4B9 USB1.B4A9 | length 24.9
  Top Layer w0.254: D1.2@95.885,41.561 95.885,38.862 96.266,38.481 R26.1
  Top Layer w0.8: C44.2@95.308,59.505 C44.2 95.631,59.182 U10.4 95.631,57.658 97.282,56.007 97.282,52.578 95.885,51.181 D1.2@95.885,41.561
USB_N: R5.2 USB1.A7 USB1.B7 | length 13.1
  Top Layer w0.254: 47.879,54.737 47.879,55.25 47.498,55.631 47.498,56.112 49.149,57.763 49.149,60.198 50.538,61.587 USB1.B7 50.538,64.651 50.419,64.77 49.657,64.77 49.53,64.643 USB1.A7@49.53,64.008
USB_P: R4.2 USB1.A6 USB1.B6 | length 12.2
  Top Layer w0.254: 46.609,54.737 46.609,55.25 46.99,55.631 46.99,56.323 48.641,57.974 48.641,60.468 50.03,61.857 50.03,62.738 ; USB1.B6 49.038,63.103 49.403,62.738 50.03,62.738 ; USB1.A6@50.03,63.754 50.03,62.738
VDD: C?.2@113.616,4.572 C?.2@118.188,4.572 P5.3 R11.1@102.518,-9.271
pads on no net: B1.3 FPC1.9 FPC1.10 FPCA1.9 FPCA1.10 FPCB1.9 FPCB1.10 K5.3 K5.4 K8.3 K8.4 K12.3 K12.4 K16.3 K16.4 R11.2@104.218,-9.271 U3.2 U3.3 U3.4 U3.5 U3.14 U3.15 U3.16 U3.17 U3.19 U3.21 U3.22 U4.2 U4.4 U4.MOUNT1 U4.MOUNT2 U4.MOUNT3 U4.MOUNT4 U5.2 U5.4 U5.MOUNT1 U5.MOUNT2 U5.MOUNT3 U5.MOUNT4 USB1. USB1.A8 USB1.B8
copper on no net: | length 696.3
  Top Layer w0.25: v1(42.824,-16.054) 42.861,-16.017 43.689,-16.017 43.714,-15.992 ; 78.994,-20.066 78.994,-18.923
  Top Layer w0.254: 40.132,-21.209 40.297,-21.044 40.213,-20.961 v1(40.213,-17.272) ; v1(40.479,-13.415) 40.479,-16.707 40.767,-16.995 40.767,-20.193 41.783,-21.209 ; v1(41.286,-13.509) 41.275,-13.521 41.275,-19.812 41.91,-20.447 45.339,-20.447 46.101,-21.209 ; 41.783,-23.495 43.053,-22.225 43.053,-21.209 ; v1(42.818,-16.992) 43.714,-16.992 ; 43.434,-14.478 42.799,-14.478 42.672,-14.605 42.672,-15.367 42.805,-15.5 43.714,-15.5 44.936,-15.5 45.085,-15.649 45.085,-18.181 48.367,-21.463 48.811,-21.463 49.192,-21.844 49.705,-21.844 ; 43.714,-14.992 45.147,-14.992 45.593,-15.438 45.593,-17.971 48.577,-20.955 48.811,-20.955 49.192,-20.574 49.705,-20.574 ; 43.714,-13.992 44.682,-13.992 45.085,-13.589 45.085,-10.414 44.577,-9.906 44.577,-8.636 ; 44.323,-23.495 44.323,-21.717 44.831,-21.209 ; 49.705,-19.304 51.054,-19.304 v1(51.562,-18.796) ; 49.705,-18.034 51.816,-18.034 52.324,-17.526 52.324,-15.24 53.503,-14.061 54.229,-14.061 ; 49.705,-16.764 50.673,-16.764 51.562,-15.875 51.562,-14.859 53.594,-12.827 54.229,-12.827 ; 50.419,-14.097 v1@51.435,-14.097 ; v2(54.229,-6.35) 54.229,-8.382 58.826,-12.979 58.826,-13.614 60.071,-14.859 60.071,-15.786 60.143,-15.859 ; 55.451,-19.304 56.388,-19.304 58.039,-20.955 ; 55.451,-18.034 57.785,-18.034 58.674,-18.923 v1@58.039,-19.558 ; 55.499,-14.061 57.567,-14.061 v1(57.658,-13.97) ; 55.499,-12.827 v1(57.658,-12.827) ; 58.039,-9.779 59.182,-9.779 ; 58.674,-23.114 57.912,-23.114 57.658,-22.86 57.658,-21.336 58.039,-20.955 ; 58.674,-21.844 60.271,-21.844 60.337,-21.91 ; 58.674,-20.193 58.752,-20.193 60.337,-18.608 ; v1@59.563,-23.041 60.337,-23.815 ; 60.337,-20.513 59.895,-20.955 58.039,-20.955 ; 61.087,-7.493 v1(59.563,-7.493) 59.182,-7.874 59.182,-9.779 ; 61.722,-11.049 61.722,-9.779 60.452,-9.779 60.388,-9.842 60.388,-11.621 60.452,-11.684 v2(60.388,-11.748) 60.833,-12.192 65.278,-12.192 65.278,-12.573 ; 62.357,-22.86 61.341,-21.844 61.341,-18.034 61.087,-17.78 61.087,-15.113 59.182,-13.208 59.182,-9.779 ; 62.357,-19.558 v1(62.357,-18.542) ; 62.357,-16.978 62.484,-16.851 62.484,-16.256 62.738,-16.002 64.262,-16.002 65.278,-17.018 65.551,-16.745 65.551,-16.618 67.237,-14.932 68.728,-14.932 ; 62.357,-14.478 62.611,-14.732 62.611,-15.113 62.865,-15.367 64.389,-15.367 65.005,-14.751 65.278,-14.478 65.91,-15.11 66.556,-15.11 67.134,-14.532 68.523,-14.532 ; 62.865,-10.922 64.008,-10.922 ; 62.865,-9.779 64.008,-9.779 ; 65.278,-10.922 66.004,-10.922 v2(66.467,-10.46) ; 65.278,-9.779 v2(65.849,-9.207) ; v1(66.167,-12.492) 68.607,-10.052 68.688,-10.052 68.858,-9.882 68.858,-9.801 ; v1(66.275,-21.891) 66.275,-20.471 67.639,-19.107 69.539,-19.107 69.936,-18.71 69.936,-18.14 ; 67.691,-9.653 67.466,-9.878 67.466,-10.385 65.278,-12.573 ; 67.817,-9.653 67.964,-9.506 67.964,-9.26 68.48,-8.744 70.123,-8.744 70.231,-8.636 71.374,-8.636 72.517,-8.636 73.406,-8.636 73.936,-9.166 73.936,-10.309 ; v1(67.818,-17.653) 67.752,-17.587 67.752,-17.392 67.691,-17.331 67.691,-16.879 68.038,-16.532 68.728,-16.532 ; v1(67.934,-18.553) 67.183,-17.801 67.183,-16.669 67.72,-16.132 68.728,-16.132 ; 68.066,-22.987 67.205,-22.987 66.902,-22.683 66.902,-20.488 67.927,-19.462 69.687,-19.462 70.336,-18.813 70.336,-18.14 ; 68.066,-21.717 68.199,-21.717 v1(68.453,-21.463) ; 68.066,-20.447 68.066,-20.072 68.32,-19.818 69.834,-19.818 70.736,-18.916 70.736,-18.14 ; 68.326,-7.493 68.326,-7.574 68.799,-8.047 v1(68.961,-8.047) ; v1(68.587,-10.855) 68.653,-10.789 69.147,-10.789 69.395,-10.541 71.108,-10.541 71.331,-10.763 71.787,-10.763 71.936,-10.912 71.936,-11.324 ; 68.728,-14.132 67.218,-14.132 66.665,-13.579 66.167,-13.081 65.278,-13.081 65.278,-12.573 ; 68.961,-9.779 v2(69.342,-9.398) 71.925,-9.398 73.136,-10.609 73.136,-11.324 ; 69.536,-18.14 69.536,-17.586 v1@69.596,-17.526 ; 71.136,-18.14 71.136,-19.722 71.317,-19.903 72.808,-19.903 v1(72.838,-19.873) ; 71.536,-18.14 71.536,-19.013 71.69,-19.167 v1(71.69,-19.26) ; v1(71.628,-10.16) 72.184,-10.16 72.736,-10.712 72.736,-11.324 ; 71.936,-18.14 71.936,-18.723 72.532,-19.319 73.899,-19.319 v1(73.914,-19.304) ; v1(73.279,-9.398) 73.536,-9.655 73.536,-11.324 ; v1(73.293,-22.493) 73.293,-22.814 73.466,-22.987 73.666,-22.987 ; 73.666,-24.257 74.549,-24.257 v1(74.803,-24.003) ; 73.666,-21.717 73.866,-21.717 74.421,-22.272 74.421,-22.533 74.87,-22.981 v1(74.87,-23.047) ; 73.666,-20.447 76.2,-20.447 76.327,-20.574 76.327,-19.685 76.962,-19.05 v1(76.962,-18.034) ; 73.936,-11.324 73.936,-10.309 ; 74.325,37.973 74.325,39.751 76.2,39.751 v1(76.581,39.37) ; 74.336,-11.324 74.336,-10.709 73.936,-10.309 ; 74.736,-11.324 74.736,-7.502 75.253,-6.985 ; 75.544,-16.132 76.711,-16.132 77.978,-17.399 78.867,-17.399 ; 75.544,-14.932 76.019,-14.932 v1(76.581,-15.494) ; 75.544,-14.532 76.635,-14.532 77.217,-15.114 v1(77.217,-15.135) ; 75.544,-13.332 76.197,-13.332 77.978,-15.113 79.375,-15.113 80.137,-15.875 81.026,-14.986 82.763,-14.986 83.693,-15.916 ; 75.544,-12.932 76.432,-12.932 78.232,-14.732 79.228,-14.732 79.99,-13.97 80.137,-13.97 81.739,-13.97 81.993,-13.716 ; 75.544,-12.532 76.413,-12.532 76.454,-12.491 76.454,-12.132 ; 75.544,-12.132 76.454,-12.132 ; v1(77.19,-20.452) 77.256,-20.518 77.486,-20.518 78.304,-21.336 78.867,-21.336 78.994,-21.209 ; v1(77.724,-21.623) 77.776,-21.623 78.232,-22.079 78.721,-22.079 78.994,-22.352 78.994,-23.495 ; v2(77.797,-13.081) 77.944,-13.081 78.198,-12.827 78.867,-12.827 78.867,-11.684 77.343,-11.684 76.895,-12.132 76.454,-12.132 ; v2@77.978,-16.256 77.978,-16.51 78.867,-17.399 ; v2(78.256,-18.118) 78.38,-17.994 78.38,-17.886 78.867,-17.399 ; 80.264,-23.495 81.245,-23.495 v2(81.362,-23.612) ; 80.264,-22.352 80.537,-22.079 81.616,-22.079 84.137,-19.558 84.709,-19.558 85.725,-18.542 85.725,-16.033 86.137,-15.621 86.809,-15.621 87.552,-16.364 87.552,-16.4 ; 80.264,-21.209 80.537,-21.482 81.642,-21.482 83.97,-19.154 84.542,-19.154 85.321,-18.375 85.321,-15.865 85.969,-15.217 86.967,-15.217 87.784,-14.4 87.952,-14.4 ; 80.264,-20.066 v2@81.661,-20.066 ; v2(84.386,-13.266) 84.513,-13.14 84.513,-6.985
  Top Layer w0.5: v2(42.164,-13.335) 41.402,-12.573 41.402,-10.254 42.804,-8.852 v2(42.804,-7.599) ; v2@47.625,-17.272 47.625,-16.386 46.866,-16.386 46.482,-16.002 46.482,-15.113 46.482,-13.97 46.482,-12.827 46.482,-12.295 47.879,-10.898 ; 47.752,-13.97 47.752,-12.827 49.149,-12.827 ; 50.927,-10.414 50.952,-10.389 50.952,-9.643 51.245,-9.35 52.534,-9.35 52.827,-9.057 52.827,-7.914 52.827,-6.599 52.578,-6.35 v2(54.229,-6.35) ; 52.827,-10.414 52.827,-11.598 v1(52.832,-11.603) ; 55.451,-15.494 59.779,-15.494 60.071,-15.786
  Bottom Layer w0.25: v1(42.824,-16.054) 42.824,-15.469 43.465,-14.828 v1(45.31,-14.828)
  Bottom Layer w0.254: v1(40.213,-17.272) 40.307,-17.272 40.587,-16.992 v1(42.818,-16.992) ; v1(40.479,-13.415) 40.479,-11.083 42.355,-9.207 v2(65.849,-9.207) 68.014,-9.207 68.966,-10.16 v1(71.628,-10.16) ; v1(41.286,-13.509) 41.286,-10.911 42.291,-9.906 45.212,-9.906 45.766,-10.46 v2(66.467,-10.46) ; v1(49.403,-12.446) 51.943,-12.446 52.786,-11.603 v1(52.832,-11.603) ; v1(51.384,-14.114) 51.384,-18.618 v1(51.562,-18.796) ; v1(57.658,-13.97) 61.087,-13.97 63.119,-11.938 73.025,-11.938 73.254,-12.167 v1(76.581,-15.494) ; v1(57.658,-12.827) 61.341,-12.827 62.759,-11.409 73.512,-11.409 77.217,-15.114 v1(77.217,-15.135) ; v1(57.912,-19.558) 57.912,-21.336 v1(59.563,-22.987) ; v1(59.563,-7.493) 71.374,-7.493 v1(73.279,-9.398) ; v1(62.357,-18.542) 62.357,-16.129 64.142,-14.344 64.315,-14.344 v1(66.167,-12.492) ; v1(66.275,-21.891) 67.082,-22.699 67.082,-22.864 67.823,-23.605 74.312,-23.605 v1(74.87,-23.047) ; v2@66.472,-10.465 66.523,-10.516 68.154,-10.516 68.493,-10.855 v1(68.587,-10.855) ; v2@66.675,-13.624 66.675,-13.97 69.632,-16.927 77.065,-16.927 v2(78.256,-18.118) 79.681,-19.543 81.298,-19.543 81.625,-19.87 81.915,-19.87 81.824,-19.962 81.824,-20.123 81.915,-20.214 81.915,-23.059 v2(81.362,-23.612) ; v1(67.818,-17.653) 68.313,-18.148 72.571,-18.148 ; v1(67.934,-18.553) 72.74,-18.552 75.536,-18.552 75.683,-18.702 77.134,-20.18 77.297,-20.346 v1(77.19,-20.452) v1(77.19,-20.452) ; v1(68.453,-21.463) 70.718,-19.198 71.627,-19.198 v1(71.69,-19.26) ; v1(68.961,-8.047) 68.961,-8.869 69.342,-9.25 v2(69.342,-9.398) ; v1(69.558,-17.481) 76.409,-17.481 v1(76.962,-18.034) ; 72.572,-18.148 75.705,-18.148 77.851,-20.334 77.851,-21.302 77.79,-21.362 77.79,-21.557 v1(77.724,-21.623) ; v1(72.838,-19.873) 72.838,-19.927 73.293,-20.381 v1(73.293,-22.493) ; v1(73.914,-19.304) 76.073,-21.463 76.073,-22.733 v1(74.803,-24.003) ; v1(76.581,39.37) 87.503,39.37 91.313,35.56 ; v2(77.797,-13.081) 77.797,-16.11 v2(77.933,-16.246) ; v1(92.225,31.784) 92.225,34.648 91.313,35.56 ; 97.028,28.956 97.028,36.576 96.139,37.465 93.218,37.465 91.313,35.56
  Bottom Layer w0.5: 39.243,-23.495 40.767,-21.971 40.767,-19.431 39.379,-18.043 39.379,-17.408 39.374,-17.403 39.374,-16.379 42.107,-13.646 42.107,-13.392 v2(42.164,-13.335) ; v2(42.804,-7.599) 42.804,-7.518 43.569,-6.753 43.569,-6.723 43.942,-6.35 v2(54.229,-6.35) 71.374,-6.35 76.962,-11.938 87.914,-11.938 87.952,-11.9 ; v2(47.58,-17.262) 47.637,-17.204 47.637,-16.903 50.707,-13.833 51.332,-13.208 54.356,-13.208 55.816,-11.748 v2(60.388,-11.748)
  other v1: 76.708,-23.749 65.024,-23.241 52.451,-22.86 77.343,-22.733 70.358,-22.479 71.755,-22.479 70.231,-21.336 71.628,-21.336 64.516,-21.082 53.34,-19.939 75.184,-19.431 64.516,-19.304 77.978,-19.177 81.661,-18.542 83.947,-18.161 82.677,-17.526 66.548,-17.399 81.788,-17.145 84.328,-17.145 53.721,-17.018 62.992,-13.335 85.725,-13.335 81.026,-12.7 83.058,-12.7 38.862,-12.573 90.932,-12.192 51.562,-11.684 54.356,-11.557 73.66,-7.239 91.186,-7.239 89.535,-6.35 73.279,-6.223 90.17,34.544 90.17,35.814
  other v2: 81.719,-19.87 66.647,-13.596

## Polygon pours and split planes (outlines as drawn)
no net on Top Solder "NONET_L-01_P-001" (solid): 91.821,62.6 89.152,62.6 89.152,56.132 88.265,55.245 86.487,55.245 86.487,47.625 87.884,46.228 87.884,42.418 90.043,42.418 91.694,44.069 91.694,45.085 90.551,46.228 90.551,50.546 90.805,50.546 93.356,53.097 93.356,54.585 93.116,54.585 92.202,55.499 91.059,55.499 90.678,55.88 90.678,58.42 91.186,58.928 93.085,58.928 93.085,61.335
no net on Bottom Solder "NONET_L-01_P-001" (solid): 100,62.013 81.19,62.013 79.248,60.071 79.248,55.118 80.137,54.229 84.836,54.229 86.487,52.578 91.694,52.578 92.583,53.467 99.949,53.467 100,53.518

## Keep-outs
Keep-Out Layer:
  circle w0.1: c84.582,-22.606 r2
  circle w0.1: c40.259,-8.001 r2
  circle w0.15: c84.582,-22.606 r1.2
  circle w0.15: c40.259,-8.001 r1.2
  circle w0.1: c95,65 r2
  circle w0.1: c95,5 r2
  circle w0.1: c5,5 r2
  circle w0.1: c5,65 r2
  circle w0.15: c95,65 r1.2
  circle w0.15: c95,5 r1.2
  circle w0.15: c5,5 r1.2
  circle w0.15: c5,65 r1.2
  lines w0.254: 0,9.017 ccw(c9,9.017) 9,0.017 ; 0,60.833 0.02,9.017 ; 0.017,60.85 cw(c9.017,60.85) 9.017,69.85 ; 9,0 25.559,0 25.559,-6.858 19.939,-6.858 19.939,-22.098 30.353,-22.098 30.353,-13.684 37.433,-13.684 ; 9,69.85 91.011,69.884 cw(c91.011,60.895) 100,60.895 100,9 cw(c91,9) 91,0 ; 37.465,-13.716 37.465,-25.273 92.456,-25.273 92.456,-5.302 77.692,-5.302 77.692,0 91.313,0 ; 54.674,0 30.353,0 27.559,0 27.559,-6.858 30.353,-6.858 30.353,-11.684 37.465,-11.684 37.465,-5.4 54.703,-5.4 ; 54.769,-5.334 54.769,-0.095 ; 75.56,-5.334 56.769,-5.334 56.769,0 75.692,0 75.692,-5.334

## Other copper
Top Layer:
  rectangle: 41.929,-17.653 42.31,-12.827
  rectangle: 42.164,-17.653 43.18,-17.399
  rectangle: 42.291,-13.081 43.18,-12.827
  rectangle: 49.657,-8.382 50.8,-7.366
  rectangle net "USB 5V": 94.996,59.817 95.758,60.325
  rectangle: 90.424,33.401 92.075,33.909
  rectangle: 89.662,32.131 90.678,33.909
  rectangle: 87.503,32.131 90.17,33.274
  pour cut-out: 74.296,-5.542 74.296,-11.177 74.93,-11.811 87.641,-11.811 88.138,-11.314 88.138,-5.334
Bottom Layer:
  pour cut-out: 74.169,-5.622 74.295,-5.748 74.295,-9.398 74.625,-9.398 77.165,-11.938 87.884,-11.938 87.884,-5.207 87.63,-5.461 74.422,-5.461

## Silkscreen, mask and mechanical layers (free items; w line width, h text height)
Top Overlay:
  circle w0.254: c14.5,49 r1.27
  lines w0.254: 4.5,49 24.5,49 ; 8.382,57.023 9.525,58.166 ; 9.525,53.594 9.525,58.166 ; 10.668,57.023 9.525,58.166 ; 14.5,39 14.5,59 ; 16.75,66.25 28.75,66.25 ; 25,12 75,12 ; 42,40.983 50,40.983 58,40.983 ; 50,64.897 50,69.897 ; 75.75,66.25 87.75,66.25 ; 88.552,-15.4 92.465,-15.4
  text "RST" at 1.143,38.251 h2
  text "+ -" at 96.52,36.703 h1.52 r270
  text "REMOTE v1.3.1" at -27.051,28.229 h3
  text "2024/9/1" at -27.051,25.689 h3
  text "IO0" at 1.216,22.133 h2
  text "ON" at 57.023,2.575 h3
  text "OFF" at 37.846,2.448 h3
Bottom Overlay:
  text "+ -" at 89.789,36.83 h1.52 r270
  text "REMOTE_RECV v1.3.1" at 73.533,-12.169 h3
  text "2024/9/1" at 67.72,-15.865 h3
  text "5V TX RX GND" at 38.465,-20.649 h2 r180
Top Solder:
  circle w1: c84.582,-22.606 r1.5
  circle w1: c40.259,-8.001 r1.5
  circle w1: c95,65 r1.5
  circle w1: c95,5 r1.5
  circle w1: c5,5 r1.5
  circle w1: c5,65 r1.5
Bottom Solder:
  circle w1: c84.582,-22.606 r1.5
  circle w1: c40.259,-8.001 r1.5
  circle w1: c5,65 r1.5
  circle w1: c95,65 r1.5
  circle w1: c95,5 r1.5
  circle w1: c5,5 r1.5
Mechanical 5:
  circle w0.254: c85.5,49 r1.27
  circle w0.254: c50,57 r1.27
  lines w0.254: 37.545,57 62.455,57 ; 50,40.983 50,49.483 ; 50,49.57 50,64.43 ; 75.5,49 95.5,49 ; 85.5,39 85.5,59
Mechanical 13:
  lines w0.254: 37.545,49.57 62.455,49.57 62.455,64.43 37.545,64.43 37.545,49.57

## Dimensions
93.98,71.755 to 95.25,-26.289 on Mechanical 5
91.011,69.884 to 91,0 on Mechanical 5
5,66.2 to 4.941,63.8 on Mechanical 5
0,60.833 to 100,60.895 on Mechanical 5

## Text inside footprints (layer, text, board x,y; h text height)
B1: Top Overlay "-" at 11.978,19.654 h1.14 r270; Top Overlay "+" at 12.703,12.934 h1.14 r45
U4: Mechanical 15 "AI" at 30.312,-1.696 h1.2 r73
U5: Mechanical 15 "AI" at 80.312,-1.696 h1.2 r73